# Allegro board DOEON_PCBv3.brd
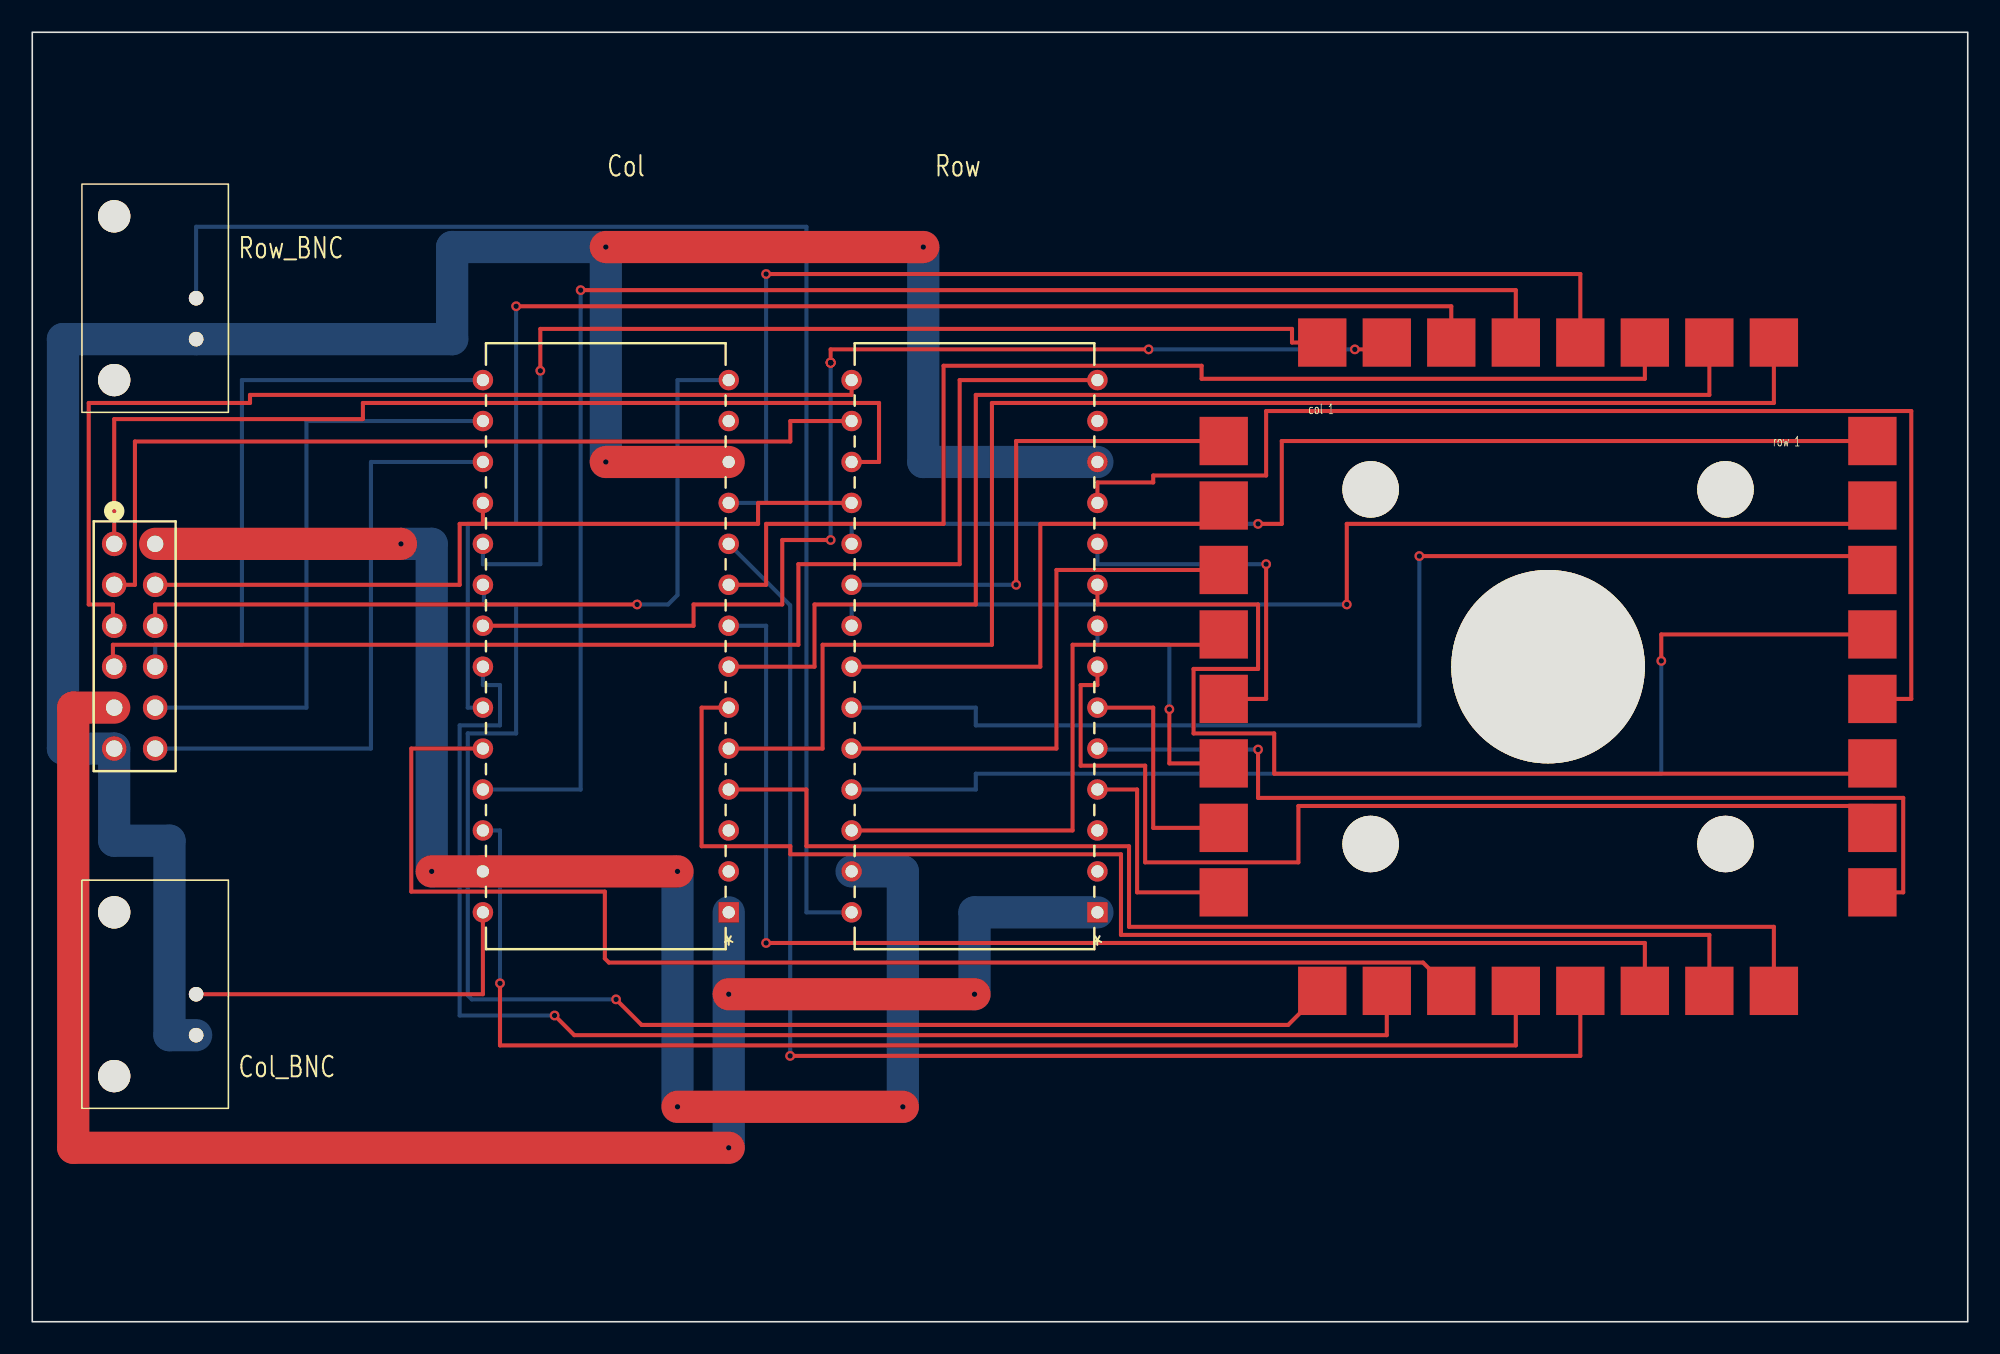
[diagram p0: board, top side]
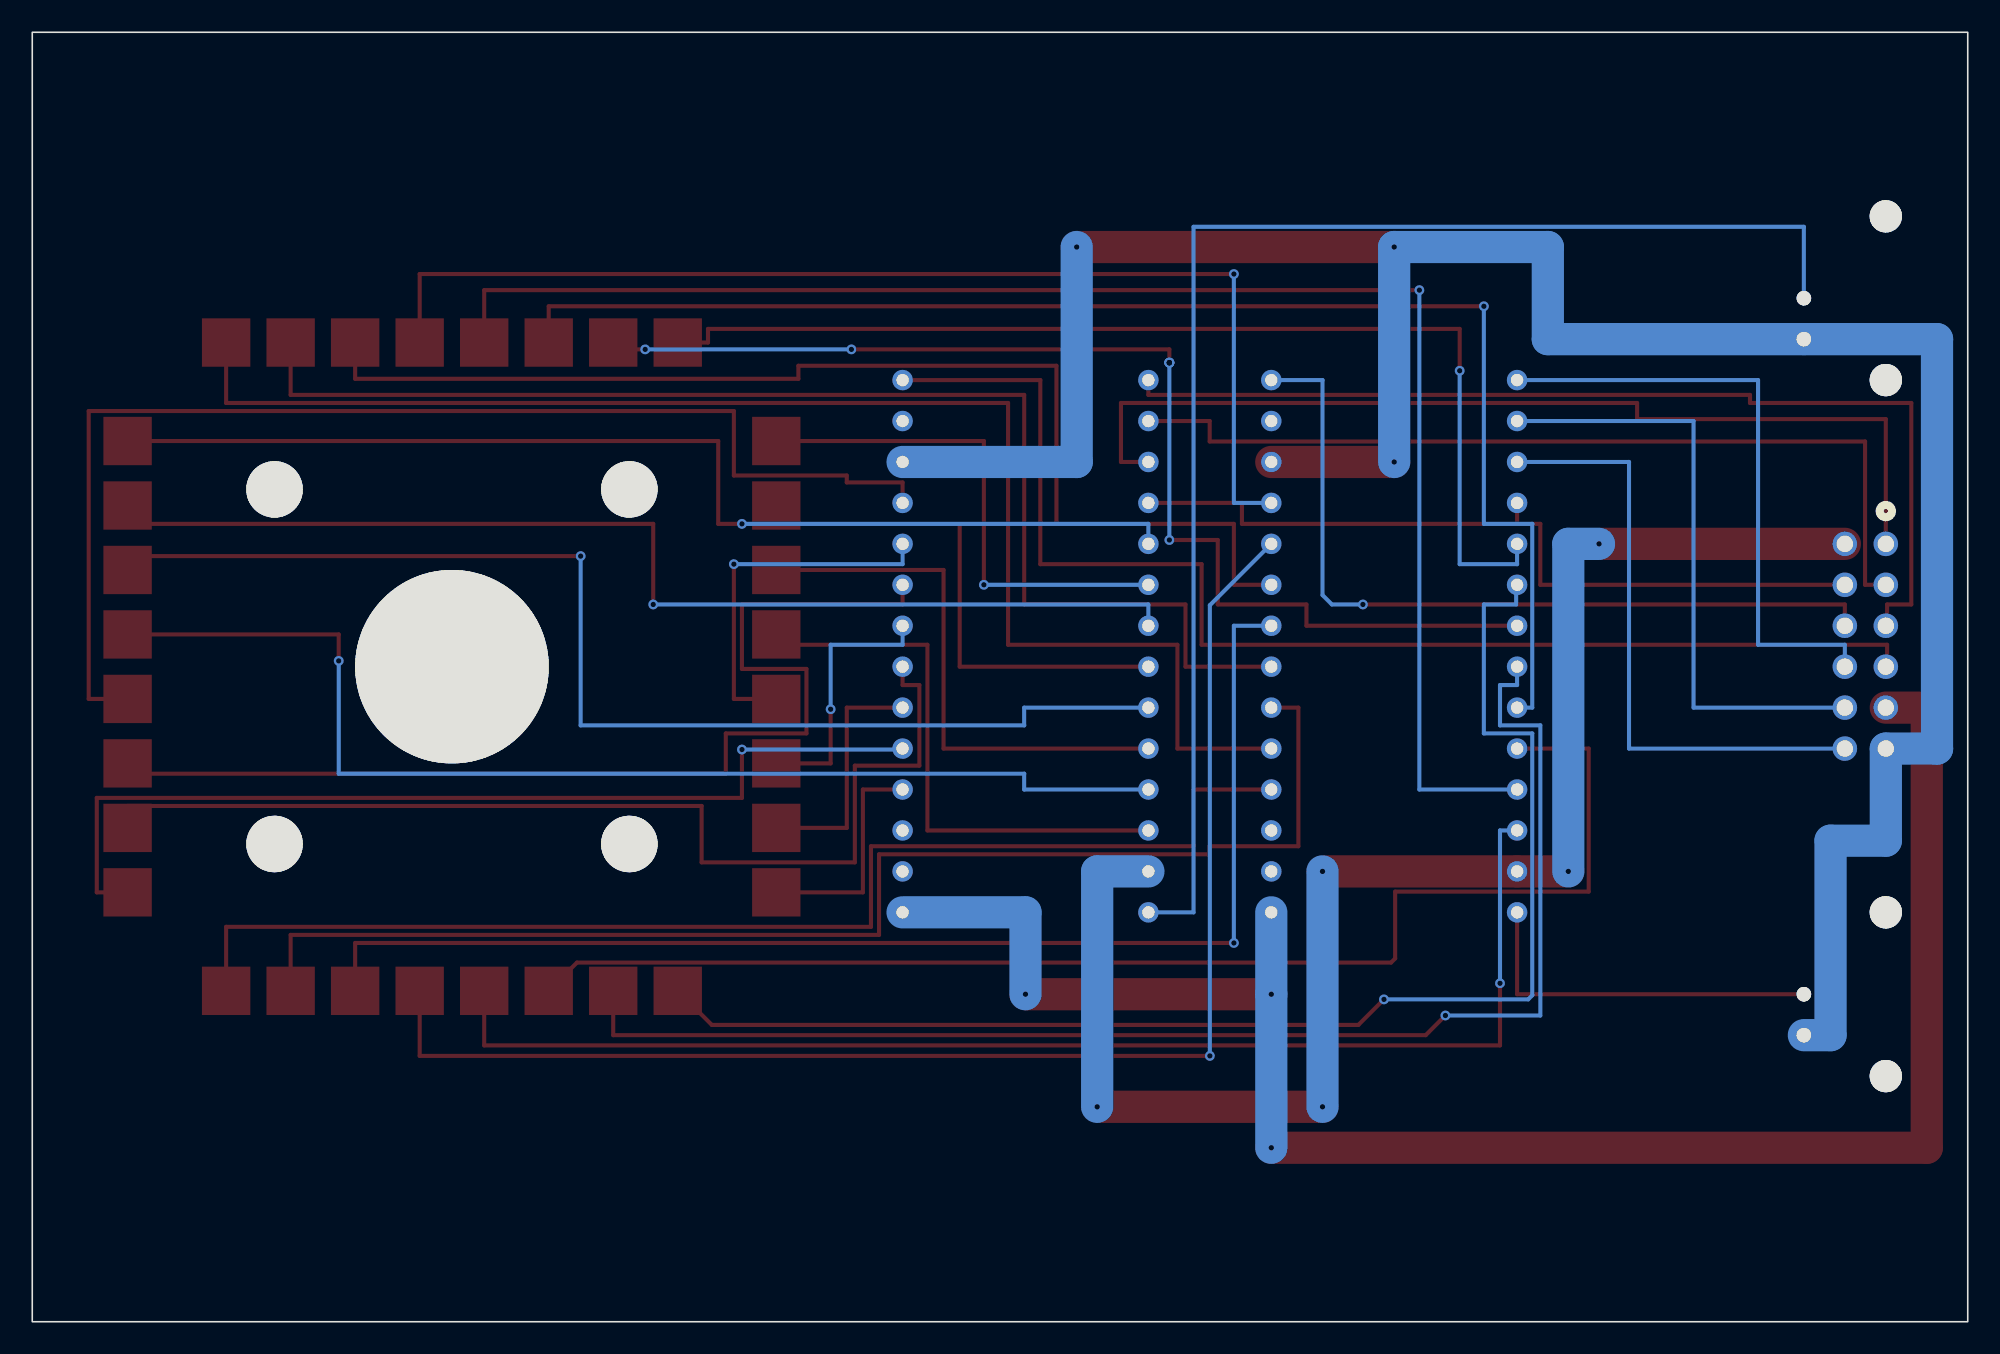
[diagram p1: board, bottom side, seen from below]

Outline 120 x 80 mm; copper layers: TOP, BOTTOM. Coordinates in mm from the lower left corner of the outline.
Outline path: rectangle 0,0 120,80

## Design rules (mm)
constraint set DEFAULT: min track width 0.254, pair gap 0.3

## Placement (name value [footprint] x y rotation side)
J1  67997-212HLF  [12PINS]  5.08 48.26 270 top
SAMPLE1  sample_holder  [SAMPLE_MOUNT]  93.98 40.64 0 top
U1  MAX396EPI  [21-0044B_28]  66.04 25.4 180 top
U2  MAX396EPI  [21-0044B_28]  43.18 25.4 180 top
VBI1  VBI211  [BNC_YB]  5.08 68.58 90 top
VBI2  VBI211  [BNC_YB]  5.08 25.4 90 top

## Library data of the parts
J1 = 67997-212HLF: User Part Number: PN; Tolerance: TOL
SAMPLE1 = sample_holder
U1 U2 = MAX396EPI: User Part Number: PN; Tolerance: TOL
VBI1 VBI2 = VBI211

## Footprints (pads in the part's own frame, mm; a bottom-side part is the same pattern mirrored in y, then rotated)
12PINS
  round 1.524 hole 1.016: A1(0,0) A2(2.54,0) A3(5.08,0) A4(7.62,0) A5(10.16,0) A6(12.7,0) B1(0,2.54) B2(2.54,2.54) B3(5.08,2.54) B4(7.62,2.54) B5(10.16,2.54) B6(12.7,2.54)
21-0044B_28
  rect 1.27x1.27 hole 0.762: 1(0,0)
  round 1.27 hole 0.762: 2(0,-2.54) 3(0,-5.08) 4(0,-7.62) 5(0,-10.16) 6(0,-12.7) 7(0,-15.24) 8(0,-17.78) 9(0,-20.32) 10(0,-22.86) 11(0,-25.4) 12(0,-27.94) 13(0,-30.48) 14(0,-33.02) 15(15.24,-33.02) 16(15.24,-30.48) 17(15.24,-27.94) 18(15.24,-25.4) 19(15.24,-22.86) 20(15.24,-20.32) 21(15.24,-17.78) 22(15.24,-15.24) 23(15.24,-12.7) 24(15.24,-10.16) 25(15.24,-7.62) 26(15.24,-5.08) 27(15.24,-2.54) 28(15.24,0)
BNC_YB
  round 0.9 hole 0.9: 1(-7.62,-5.08) 2(-5.08,-5.08)
  round 2 hole 2: 3(-10.16,0) 4(0,0)
SAMPLE_MOUNT
  rect 3x3 smd: 1(20.11,14) 2(-20.11,14) 3(20.11,10) 4(-20.11,10) 5(20.11,6) 6(-20.11,6) 7(20.11,2) 8(-20.11,2) 9(20.11,-2) 10(-20.11,-2) 11(20.11,-6) 12(-20.11,-6) 13(20.11,-10) 14(-20.11,-10) 15(20.11,-14) 16(-20.11,-14) 17(-14,20.11) 18(-14,-20.11) 19(-10,20.11) 20(-10,-20.11) 21(-6,20.11) 22(-6,-20.11) 23(-2,20.11) 24(-2,-20.11) 25(2,20.11) 26(2,-20.11) 27(6,20.11) 28(6,-20.11) 29(10,20.11) 30(10,-20.11) 31(14,20.11) 32(14,-20.11)
  round 3.5 hole 3.5: 33(-11,11) 34(11,11) 35(-11,-11) 36(11,-11)
  round 12 hole 12: 37(0,0)

## Nets
GND: J1.A6 U1.12 U2.12 VBI1.1 VBI2.1
COL_1: SAMPLE1.17 U2.19
COL_2: SAMPLE1.18 U2.20
COL_3: SAMPLE1.19 U2.21
COL_4: SAMPLE1.20 U2.22
COL_5: SAMPLE1.21 U2.23
COL_6: SAMPLE1.22 U2.24
COL_7: SAMPLE1.23 U2.25
COL_8: SAMPLE1.24 U2.26
COL_9: SAMPLE1.25 U2.11
COL_10: SAMPLE1.26 U2.10
COL_11: SAMPLE1.27 U2.9
COL_12: SAMPLE1.28 U2.8
COL_13: SAMPLE1.29 U2.7
COL_14: SAMPLE1.30 U2.6
COL_15: SAMPLE1.31 U2.5
COL_16: SAMPLE1.32 U2.4
COL_A0: J1.B6 U2.17
COL_A1: J1.B5 U2.16
COL_A2: J1.B4 U2.15
COL_A3: J1.B3 U2.14
EN: J1.B2 U1.18 U2.18
PULSE_IN: U1.28 VBI1.2(I_O)
PULSE_OUT: U2.28 VBI2.2(I_O)
ROW_1: SAMPLE1.1 U1.19
ROW_2: SAMPLE1.2 U1.20
ROW_3: SAMPLE1.3 U1.21
ROW_4: SAMPLE1.4 U1.22
ROW_5: SAMPLE1.5 U1.23
ROW_6: SAMPLE1.6 U1.24
ROW_7: SAMPLE1.7 U1.25
ROW_8: SAMPLE1.8 U1.26
ROW_9: SAMPLE1.9 U1.11
ROW_10: SAMPLE1.10 U1.10
ROW_11: SAMPLE1.11 U1.9
ROW_12: SAMPLE1.12 U1.8
ROW_13: SAMPLE1.13 U1.7
ROW_14: SAMPLE1.14 U1.6
ROW_15: SAMPLE1.15 U1.5
ROW_16: SAMPLE1.16 U1.4
ROW_A0: J1.A1 U1.17
ROW_A1: J1.A2 U1.16
ROW_A2: J1.A3 U1.15
ROW_A3: J1.A4 U1.14
V+: J1.A5 U1.1 U2.1
V-: J1.B1 U1.27(V-) U2.27(V-)

Pads without a net: SAMPLE1 33 34 35 36 37; U1 2 3 13; U2 2 3 13; VBI1 3 4; VBI2 3 4

## Via types
v1: diameter 0.61, hole 0.33, TOP to BOTTOM, 39 vias

## Routing (per net, layer and track width the routed paths; a pad name or vN(x,y) marks a point on that pad's centre or on a via; arc(x,y) is an arc through that point)
GND: length 155.6
  TOP w2: v1(55.24,66.67) v1(35.56,66.67) ; v1(35.56,53.34) U2.12
  BOTTOM w2: v1(55.24,66.67) 55.24,53.34 U1.12 ; v1(35.56,53.34) v1(35.56,66.67) 26.04,66.67 26.04,60.96 VBI1.1 1.91,60.96 1.91,35.56 J1.A6 5.08,29.84 8.51,29.84 8.51,17.78 VBI2.1
COL_1: length 68.7
  TOP w0.254: v1(31.5,59) 31.5,61.59 78.11,61.59 78.11,60.75 SAMPLE1.17
  BOTTOM w0.254: v1(31.5,59) 31.5,47 27.94,47 U2.19
COL_2: length 85.1
  TOP w0.254: SAMPLE1.18 77.86,18.41 37.78,18.41 v1(36.2,20)
  BOTTOM w0.254: v1(36.2,20) 27.25,20 27,20.25 27,36.5 30,36.5 30,44.5 28,44.5 28,45.72 U2.20
COL_3: length 73.5
  TOP w0.254: v1(69.22,60.33) 49.5,60.33 v1(49.5,59.5) ; SAMPLE1.19 83.98,60.58 83.73,60.33 v1(82,60.33) ; U2.21 41,43.18 41,44.5 46.5,44.5 46.5,48.5 v1(49.5,48.5)
  BOTTOM w0.254: v1(49.5,59.5) v1(49.5,48.5) ; v1(69.22,60.33) v1(82,60.33)
COL_4: length 85.9
  TOP w0.254: v1(32.38,19) 33.6,17.78 83.98,17.78 SAMPLE1.20
  BOTTOM w0.254: v1(32.38,19) 26.5,19 26.5,37 29,37 29,39.5 27.94,39.5 U2.22
COL_5: length 89.1
  TOP w0.254: v1(30,63) 87.98,63 SAMPLE1.21
  BOTTOM w0.254: v1(30,63) 30,49.5 27,49.5 27,38.1 U2.23
COL_6: length 82.8
  TOP w0.254: SAMPLE1.22 86.23,22.28 35.75,22.28 35.5,22.54 35.5,26.69 23.5,26.69 23.5,35.56 U2.24
COL_7: length 98.3
  TOP w0.254: v1(34,64) 91.98,64 SAMPLE1.23
  BOTTOM w0.254: v1(34,64) 34,33.02 U2.25
COL_8: length 80.8
  TOP w0.254: v1(29,21) 29,17.14 91.98,17.14 SAMPLE1.24
  BOTTOM w0.254: U2.26 29,30.48 v1(29,21)
COL_9: length 71.2
  TOP w0.254: v1(45.5,65) 95.98,65 SAMPLE1.25
  BOTTOM w0.254: U2.11 45.5,50.8 v1(45.5,65)
COL_10: length 86.4
  TOP w0.254: v1(46.99,16.49) 95.98,16.49 SAMPLE1.26
  BOTTOM w0.254: v1(46.99,16.49) 46.99,44.45 U2.10
COL_11: length 73.4
  TOP w0.254: U2.9 45.5,45.72 45.5,49.5 56.5,49.5 56.5,59.31 72.5,59.31 72.5,58.5 99.98,58.5 SAMPLE1.27
COL_12: length 79.4
  TOP w0.254: v1(45.5,23.5) 99.98,23.5 SAMPLE1.28
  BOTTOM w0.254: v1(45.5,23.5) 45.5,43.18 U2.8
COL_13: length 80.9
  TOP w0.254: U2.7 48.5,40.64 48.5,44.5 58.5,44.5 58.5,57.5 103.98,57.5 SAMPLE1.29
COL_14: length 81.7
  TOP w0.254: U2.6 41.5,38.1 41.5,29.5 47,29.5 47,29 67.5,29 67.5,24 103.98,24 SAMPLE1.30
COL_15: length 90
  TOP w0.254: SAMPLE1.31 107.98,57 59.5,57 59.5,42 49,42 49,35.56 U2.5
COL_16: length 77.3
  TOP w0.254: U2.4 48,33.02 48,29.5 68,29.5 68,24.5 107.98,24.5 SAMPLE1.32
COL_A0: length 38.1
  BOTTOM w0.254: J1.B6 21,35.56 21,53.34 U2.17
COL_A1: length 38.1
  BOTTOM w0.254: U2.16 17,55.88 17,38.1 J1.B5
COL_A2: length 38.1
  BOTTOM w0.254: U2.15 13,58.42 13,42 7.62,42 J1.B4
COL_A3: length 50.5
  TOP w0.254: J1.B3 7.62,44.5 v1(37.5,44.5)
  BOTTOM w0.254: v1(37.5,44.5) 39.42,44.5 40.01,45.09 40.01,58.42 U2.14
EN: length 49.6
  TOP w0.254: J1.B2 26.5,45.72 26.5,49.5 27.94,49.5 ; 27.94,49.5 45,49.5 45,50.8 U1.18 ; 27.94,49.5 U2.18
PULSE_IN: length 87.6
  BOTTOM w0.254: U1.28 48,25.4 48,67.93 10.16,67.93 VBI1.2
PULSE_OUT: length 22.9
  TOP w0.254: U2.28 27.94,20.32 VBI2.2
ROW_1: length 69.7
  TOP w0.254: v1(76,49.5) 77.47,49.5 77.47,54.64 SAMPLE1.1
  BOTTOM w0.254: U1.19 50.8,49.5 v1(76,49.5)
ROW_2: length 32
  TOP w0.254: v1(61,45.72) 61,54.64 SAMPLE1.2
  BOTTOM w0.254: U1.20 v1(61,45.72)
ROW_3: length 70.8
  TOP w0.254: v1(81.5,44.5) 81.5,49.5 114.09,49.5 SAMPLE1.3
  BOTTOM w0.254: U1.21 50.8,44.5 v1(81.5,44.5)
ROW_4: length 33.1
  TOP w0.254: SAMPLE1.4 73.87,49.5 62.5,49.5 62.5,40.64 U1.22
ROW_5: length 75.8
  TOP w0.254: SAMPLE1.5 114.09,47.5 v1(86,47.5)
  BOTTOM w0.254: U1.23 58.5,38.1 58.5,37 86,37 v1(86,47.5)
ROW_6: length 34.2
  TOP w0.254: SAMPLE1.6 63.5,46.64 63.5,35.56 U1.24
ROW_7: length 72.9
  TOP w0.254: SAMPLE1.7 101,42.64 v1(101,41)
  BOTTOM w0.254: U1.25 58.5,33.02 58.5,34 101,34 v1(101,41)
ROW_8: length 35.2
  TOP w0.254: U1.26 64.5,30.48 64.5,42 73.87,42 SAMPLE1.8
ROW_9: length 76.4
  TOP w0.254: SAMPLE1.9 116.5,38.64 116.5,56.5 76.5,56.5 76.5,52.5 69.5,52.5 69.5,52.07 66.04,52.07 U1.11
ROW_10: length 22.7
  TOP w0.254: v1(76.5,47) 76.5,38.64 SAMPLE1.10
  BOTTOM w0.254: v1(76.5,47) 66.04,47 U1.10
ROW_11: length 68.4
  TOP w0.254: SAMPLE1.11 114.09,34 77,34 77,36.5 72,36.5 72,40.5 76,40.5 76,44.5 66.04,44.5 U1.9
ROW_12: length 16.4
  TOP w0.254: SAMPLE1.12 70.5,34.64 v1(70.5,38)
  BOTTOM w0.254: U1.8 66.04,42 70.5,42 v1(70.5,38)
ROW_13: length 67.1
  TOP w0.254: U1.7 66.04,39.5 65,39.5 65,34.5 69,34.5 69,28.5 78.5,28.5 78.5,32 114.09,32 SAMPLE1.13
ROW_14: length 15.3
  TOP w0.254: SAMPLE1.14 69.5,30.64 69.5,38.1 U1.6
ROW_15: length 60.8
  TOP w0.254: v1(76,35.5) 76,32.5 116,32.5 116,26.64 SAMPLE1.15
  BOTTOM w0.254: v1(76,35.5) 66.04,35.5 U1.5
ROW_16: length 14.2
  TOP w0.254: U1.4 68.5,33.02 68.5,26.64 SAMPLE1.16
ROW_A0: length 61.5
  TOP w0.254: U1.17 52.5,53.34 52.5,57 20.5,57 20.5,56 5.08,56 J1.A1
ROW_A1: length 55.9
  TOP w0.254: U1.16 47,55.88 47,54.61 6.37,54.61 6.37,45.72 J1.A2
ROW_A2: length 64.1
  TOP w0.254: U1.15 50.8,57.5 13.5,57.5 13.5,57 3.5,57 3.5,44.5 5,44.5 5,43.18 J1.A3
ROW_A3: length 78.9
  TOP w0.254: J1.A4 5,40.64 5,42 47.5,42 47.5,47 57.5,47 57.5,58.42 U1.14
V+: length 113
  TOP w2: v1(43.18,10.79) 2.54,10.79 2.54,38.1 J1.A5 ; v1(43.18,20.32) v1(58.42,20.32)
  BOTTOM w2: v1(58.42,20.32) 58.42,25.4 U1.1 ; v1(43.18,10.79) v1(43.18,20.32) U2.1
V-: length 99.1
  TOP w2: v1(24.77,27.94) v1(27.94,27.94) v1(40.01,27.94) ; J1.B1 v1(22.86,48.26) ; v1(53.98,13.34) v1(40.01,13.34)
  BOTTOM w2: v1(40.01,27.94) v1(40.01,13.34) ; v1(24.77,27.94) 24.77,48.26 v1(22.86,48.26) ; U1.27 53.98,27.94 v1(53.98,13.34)

## Text on the board
Ref Des/Silkscreen Top: Row_BNC | Col_BNC | Col | Row
